# Altium PCB Screen.PcbDoc
Units mil, origin at the board's own origin, x right, y up, seen from the top; angles counter-clockwise.
Board outline 1377.95 x 1377.95 mil, 2 copper layers (Top Layer, Bottom Layer), stack 46.501 mil thick; 11 components, 11 nets, 36 pads, 15 vias.
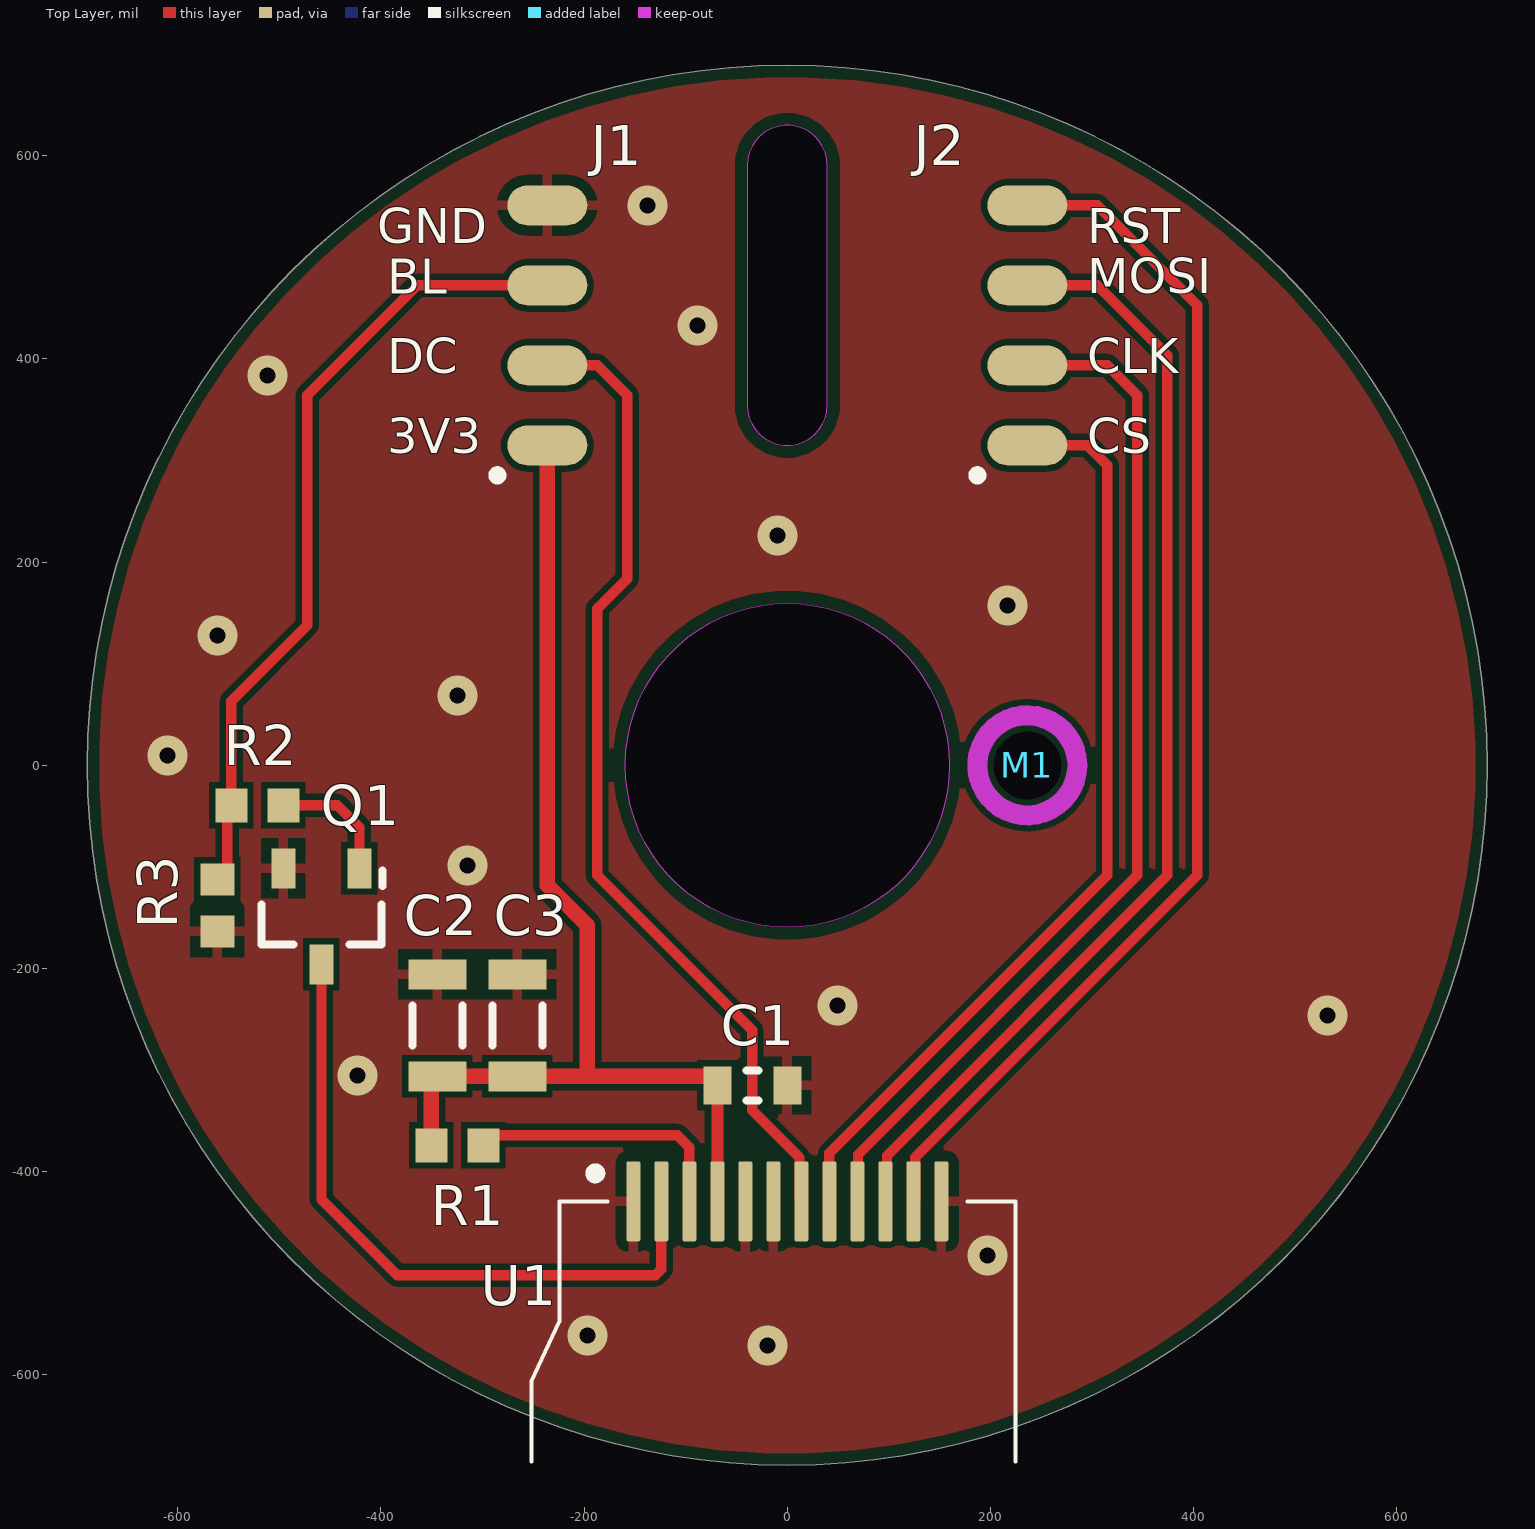
[diagram p0: Top Layer view]
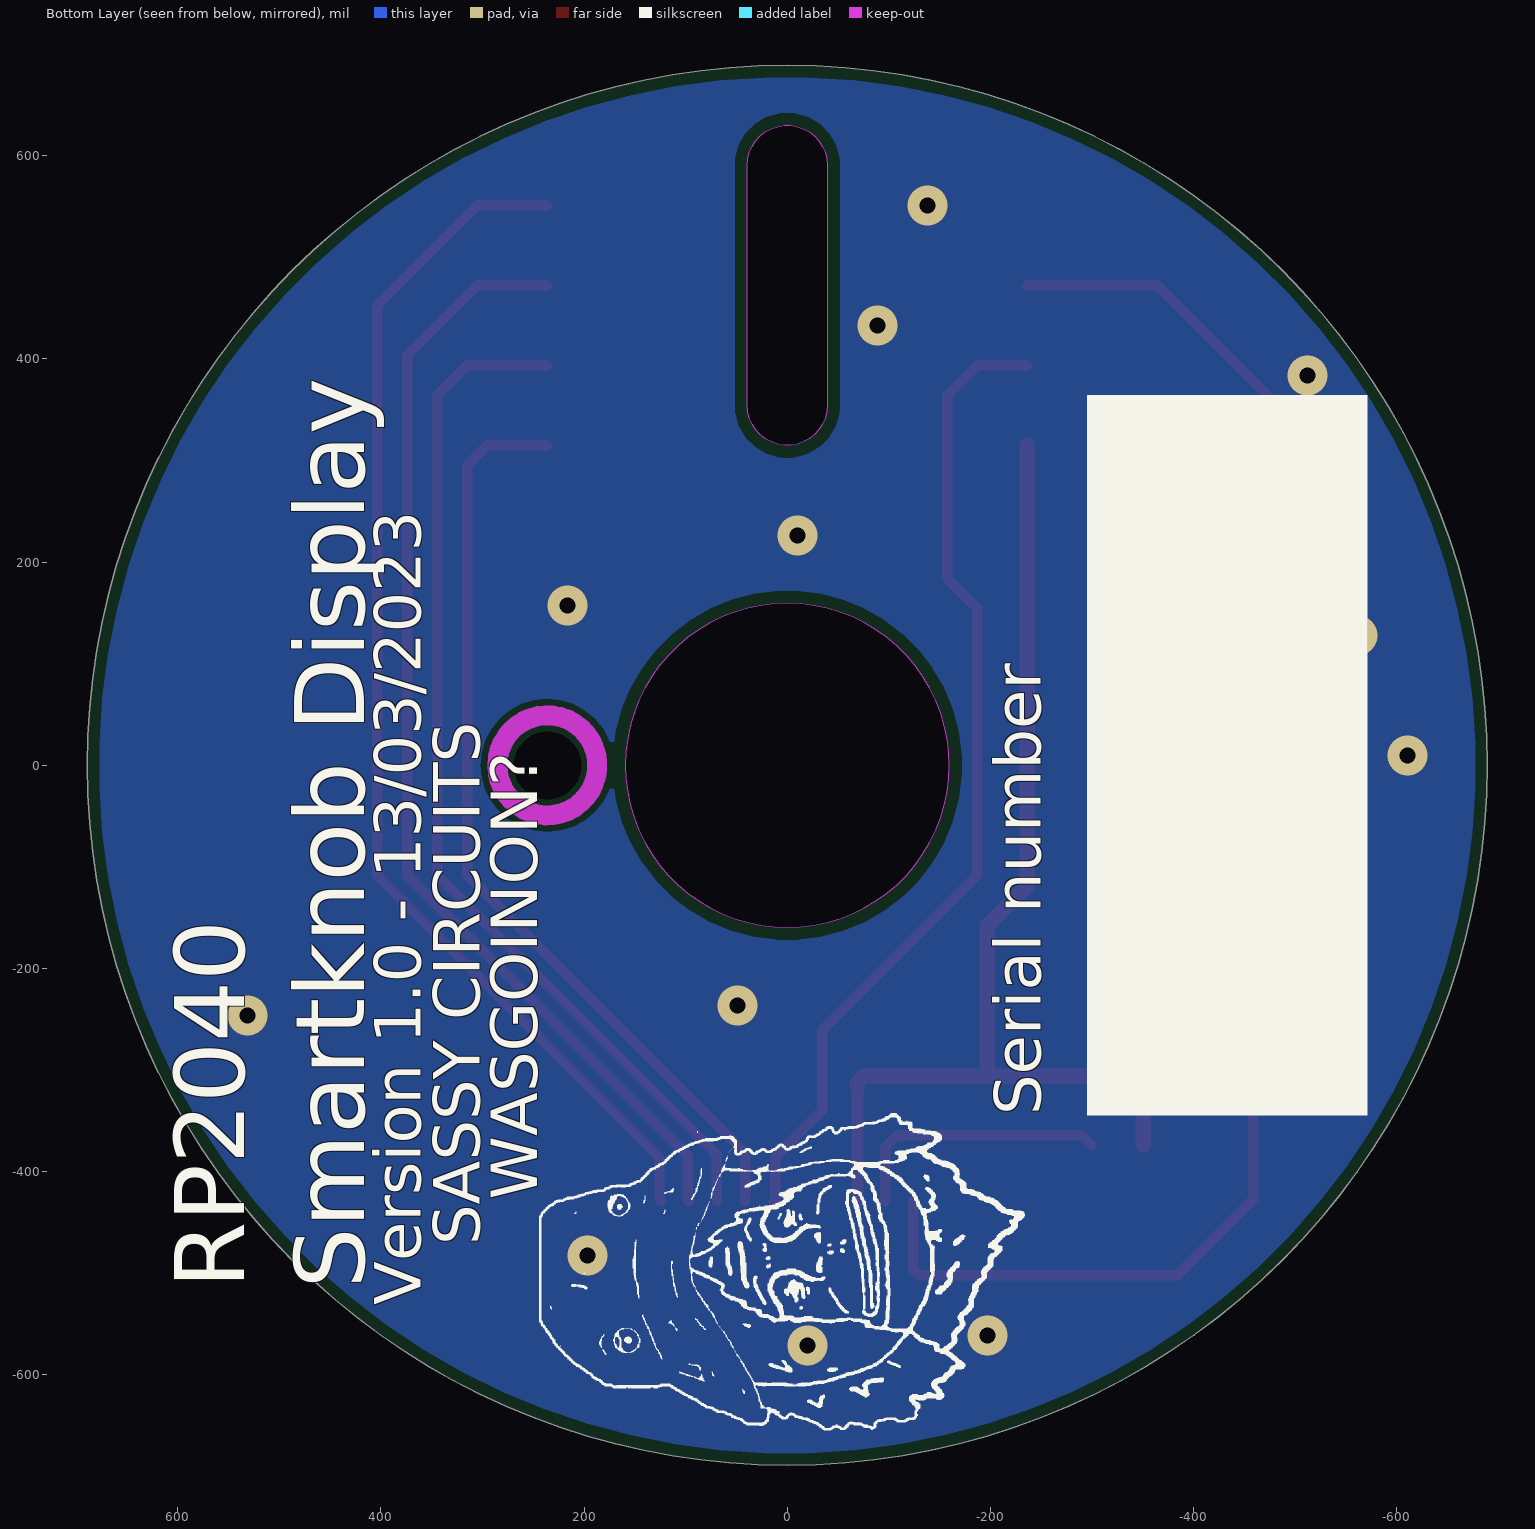
[diagram p1: Bottom Layer view, seen from below]
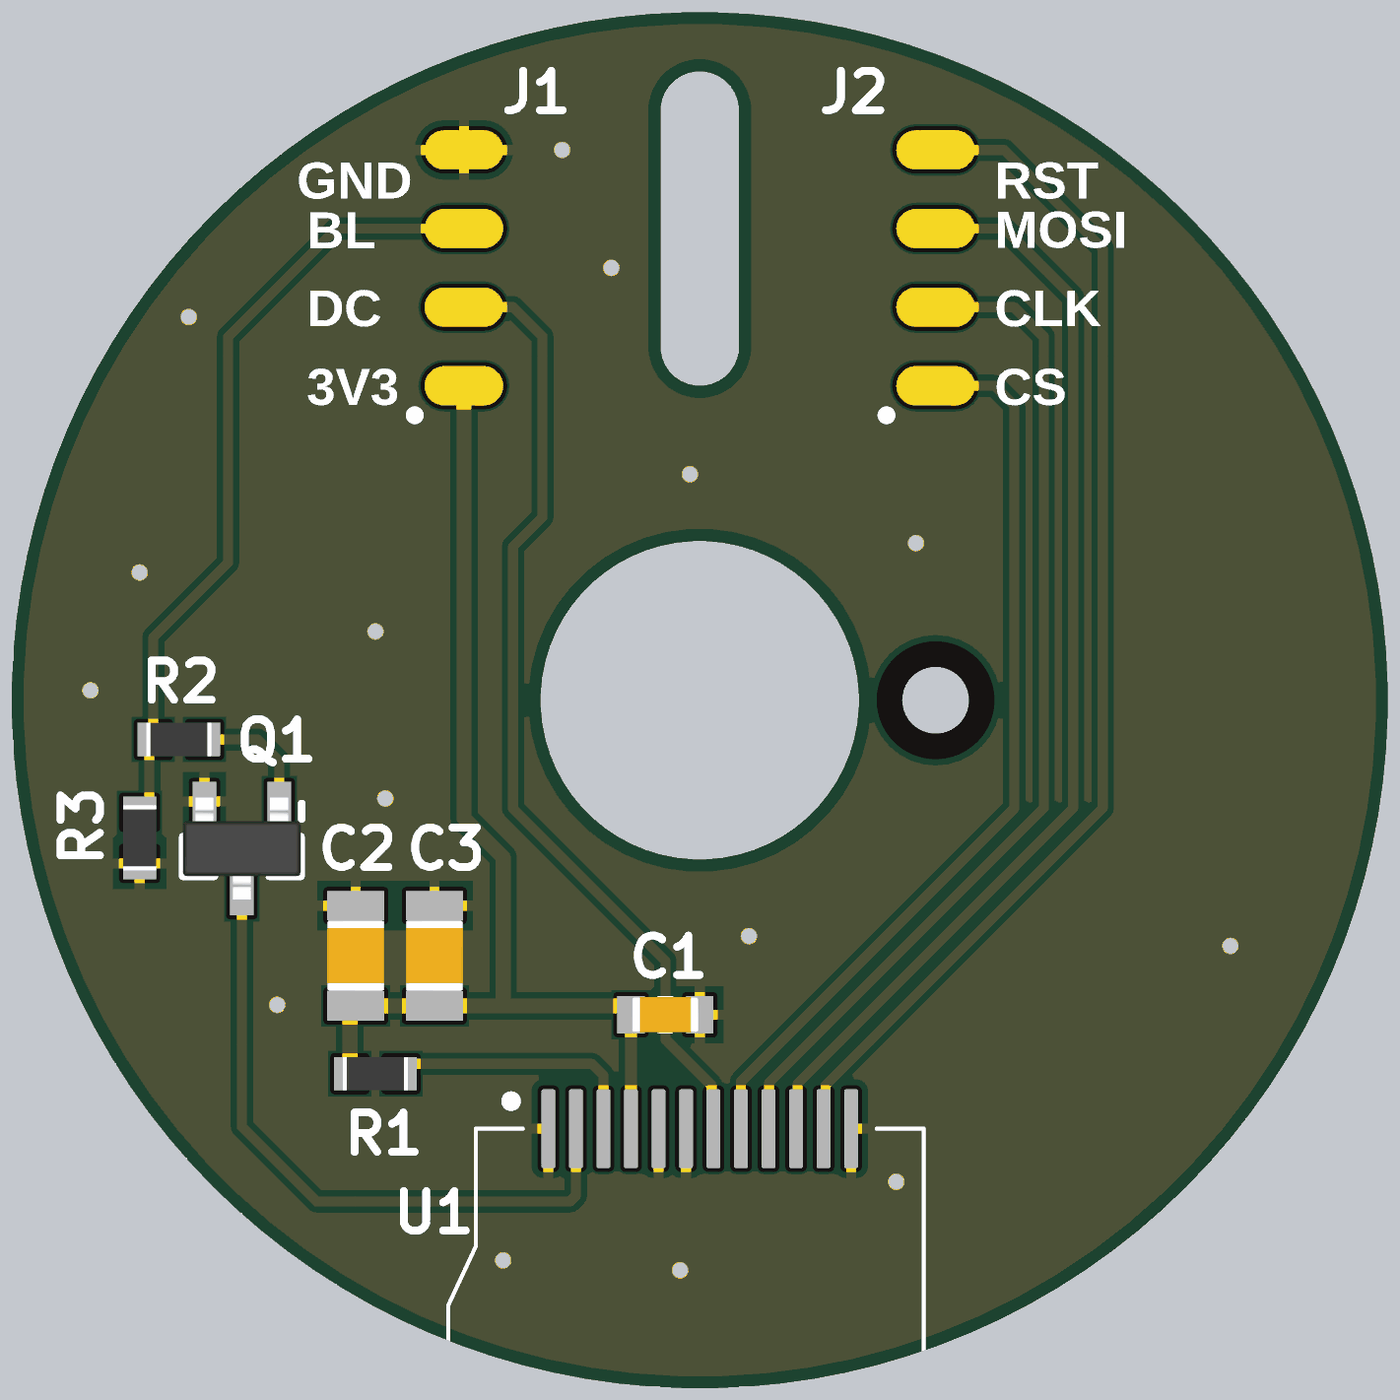
[diagram p2: 3D render of the assembled board from above, using the file's embedded part models]

## Layer stack, top to bottom
Top Solder: solder mask 0.4, Solder Resist, Dk 3.5
Top Layer: signal copper 1.4
Dielectric 1: dielectric 43.7008, FR-4, Dk 4.8
Bottom Layer: signal copper 1.4
Bottom Solder: solder mask 0.4, Solder Resist, Dk 3.5

## Board outline
0,-688.98 cw(c0,0) -688.98,0 cw(c0,0) 0,688.98 cw(c0,0) 688.98,0 cw(c0,0)
cut-out: -39.37,354.33 ccw(c0,354.33) 39.37,354.33 39.37,590.55 ccw(c0,590.55) -39.37,590.55
cut-out: 0,-159.45 cw(c0,0) -159.45,0 cw(c0,0) 0,159.45 cw(c0,0) 159.45,0 cw(c0,0)

## Design rules (kind name [scope] priority, off if disabled: settings)
BoardOutlineClearance [All] p1: gap=11.81 ignorepadtopadclearanceinfootprint=FALSE except(0: Arc-SplitContinuation Track-SplitContinuation SMDPad-SplitContinuation THPad-SplitContinuation Via-SplitContinuation Fill-SplitContinuation Poly-SplitContinuation Region-SplitContinuation Text-SplitContinuation; 10: Arc-OutlineEdge Arc-CavityEdge Arc-CutoutEdge Arc-SplitBarrior Text-OutlineEdge Text-CavityEdge Text-CutoutEdge Text-SplitBarrior)
Clearance [All] p1: gap=6 ignorepadtopadclearanceinfootprint=FALSE except(0: Arc-Hole Track-Hole SMDPad-Hole THPad-Hole Via-Hole Fill-Hole Poly-Hole Region-Hole Text-Hole)
ComponentClearance [All] p1: gap=3.94 collisioncheckmode=3 verticalgap=10 showdistances=FALSE
HoleSize [All] p1: absolutevalues=TRUE maxlimit=236.22 minlimit=11.81 maxpercent=80.000 minpercent=20.000
MinimumAnnularRing [All] p1: minimumring=5.91
MinimumSolderMaskSliver [All] p1: minsoldermaskwidth=3.94
PolygonConnect [All] p1: thpad.connectstyle=Relief thpad.reliefconductorwidth=10 thpad.reliefentries=4 thpad.polygonreliefangle="90 Angle" thpad.airgapwidth=10 smdpad.connectstyle=Relief smdpad.reliefconductorwidth=10 smdpad.reliefentries=4 smdpad.polygonreliefangle="90 Angle" smdpad.airgapwidth=10 via.connectstyle=Direct via.reliefconductorwidth=10 via.reliefentries=4 via.polygonreliefangle="90 Angle" via.airgapwidth=10
RoutingVias [All] p1: holewidth=15.75 width=39.37 viastyle="Through Hole" minholewidth=11.81 minwidth=27.56 maxholewidth=39.37 maxwidth=157.48
SilkToSolderMaskClearance [IsPad] p1: minsilkscreentomaskgap=5.91 clearancetoexposedcopper=TRUE
SolderMaskExpansion [All] p1: expansion=4 istentingtop=FALSE
Width [All] p1: maxlimit=100 minlimit=6 preferedwidth=10 minimp=50.000000 maximp=50.000000 favimp=50.000000
26 further rules are at their usual default settings.

## Components (designator, comment, footprint, x,y, rotation, side; value= is the part's Value field where it differs from the comment)
C1 "CAP" C0603 -34.45,-314.96 r0 top value=100nF
C2 "CAP" C0805 -344.49,-255.91 r90 top value=10uF
C3 "CAP" C0805 -265.75,-255.91 r90 top value=10uF
J1 "Conn-4pos" 2mm_pads_4 -236.22,433.07 r90 top
J2 "Conn-4pos" 2mm_pads_4 236.22,433.07 r90 top
M1 "Mounting_Hole_Unplated" M1.6_Close_Unplated 236.22,0 r0 top locked
Q1 "NMOS_SOT23" SOT23 -458.65,-148.63 r270 top value=NMOS
R1 "RES" R0603 -324.8,-374.02 r180 top value=22R
R2 "RES" R0603 -521.65,-39.37 r0 top value=10K
R3 "RES" R0603 -561.02,-137.8 r90 top value=1M
U1 "GC9A01" GC9A01 0,-429.13 r90 top locked value=Display

## Footprints (in the part's own frame and the unit in brackets; to place one, negate y for a bottom-side part, rotate by r counter-clockwise, add the part's x,y. Pads: shape width x height; smd on the part's side, far side on the other; paste and mask are expansions set on the pad)
2mm_pads_4 [mm]
  oval 1x2 smd paste-2539.97: 1(-3,0) 2(-1,0) 3(1,0) 4(3,0)
  silkscreen extent -3.85,1.15 -3.65,1.35
C0603 [mm]
  rect 0.7x0.95 smd: 1(-0.875,0) 2(0.875,0)
  silkscreen extent -0.15,-0.38 0.15,0.38, body extent -0.85,-0.45 0.85,0.45, height 0.9
C0805 [mm]
  rect 0.75x1.45 smd: 1(-1.275,0) 2(1.275,0)
  silkscreen extent -0.5,-0.63 0.5,0.63, body extent -0.9,-0.72 0.9,0.72, height 1.45
GC9A01 [mm]
  rrect25% 2x0.35 smd: 1(0,3.85) 2(0,3.15) 3(0,2.45) 4(0,1.75) 5(0,1.05) 6(0,0.35) 7(0,-0.35) 8(0,-1.05) 9(0,-1.75) 10(0,-2.45) 11(0,-3.15) 12(0,-3.85)
  silkscreen extent -6.5,-5.7 0.82,6.4
M1.6_Close_Unplated [mm]
  round 0 hole 1.7 unplated mask+1.5: 1(0,0)
  Keep-Out Layer circle w0.5: c0,0 r1.25
R0603 [mm]
  rect 0.8x0.85 smd: 1(-0.65,0) 2(0.65,0)
  body extent -0.82,-0.43 0.82,0.43, height 0.5
SOT23 [mm]
  rect 1x0.6 smd: 1(-1.2,0.95) 2(-1.2,-0.95) 3(1.2,0)
  silkscreen extent -1.14,-1.5 0.7,1.52, body extent -1.3,-1.5 1.3,1.5, height 1.1

## Part data
C1: library part CGA3E2X7R1H104K080AA, "General purpose ceramic capacitor", Manufacturer="TDK Corporation", Package Ref=C0603, Supplier Part No=445-5666-1-ND, Voltage=50V, Fitted=Fitted, Generic=Generic, Manufacturer Part No=CGA3E2X7R1H104K080AA, Part Reference=CGA3E2X7R1H104K080AA, Ready for use=y, Specification="X7R, 50V, AEC-Q200 Qualified", Supplier=Digi-Key
C2 C3: library part CGA4J1X7S1C106K125AC, "General purpose ceramic capacitor", Manufacturer="TDK Corporation", Package Ref=C0805, Supplier Part No=445-16110-1-ND, Voltage=16V, Fitted=Fitted, Generic=Generic, Manufacturer Part No=CGA4J1X7S1C106K125AC, Part Reference=CGA4J1X7S1C106K125AC, Ready for use=y, Specification="X7S, 16V, AEC-Q200 Qualified", Supplier=Digi-Key
J1 J2: library part 2mm_pads_4, "2mm pitch solder pads", Fitted=Fitted, Generic=Generic, Manufacturer Part No=2mm_pads_4, Package Ref=2mm_pads_4, Part Reference=2mm_pads_4, Ready for use=y
M1: library part M1.6_Close_Unplated, "M1.6 Hole, Unplated", Fitted=Fitted, Generic=Generic, Package Ref=M1.6_Close_Unplated, Part Reference=M1.6_Close_Unplated, Ready for use=y, Specification="Close clearance"
Q1: library part BSS138, "General purpose N-Channel MOSFET in SOT23 packagge", Manufacturer=onsemi, Package Ref=SOT23, Supplier Part No=BSS138CT-ND, Fitted=Fitted, Generic=Generic, Manufacturer Part No=BSS138, Part Reference=BSS138, Ready for use=y, Specification="Vds 50V, Id 220mA", Supplier=Digi-Key
R1: library part CRCW060322R0JNEA, "General purpose automotive thick film resistor", Manufacturer="Vishay Dale", Package Ref=R0603, Supplier Part No=541-22GCT-ND, Fitted=Fitted, Generic=Generic, Manufacturer Part No=CRCW060322R0JNEA, Part Reference=CRCW060322R0JNEA, Ready for use=y, Specification="5%, 200ppm, 0.1W, AEC-Q200 Qualified", Supplier=Digi-Key
R2: library part CRCW060310K0JNEA, "General purpose automotive thick film resistor", Manufacturer="Vishay Dale", Package Ref=R0603, Supplier Part No=541-10KGCT-ND, Fitted=Fitted, Generic=Generic, Manufacturer Part No=CRCW060310K0JNEA, Part Reference=CRCW060310K0JNEA, Ready for use=y, Specification="5%, 200ppm, 0.1W, AEC-Q200 Qualified", Supplier=Digi-Key
R3: library part CRCW06031M00JNEA, "General purpose automotive thick film resistor", Manufacturer="Vishay Dale", Package Ref=R0603, Supplier Part No=541-1.0MGCT-ND, Fitted=Fitted, Generic=Generic, Manufacturer Part No=CRCW06031M00JNEA, Part Reference=CRCW06031M00JNEA, Ready for use=y, Specification="5%, 200ppm, 0.1W, AEC-Q200 Qualified", Supplier=Digi-Key
U1: "240x240 px round IPS display", Manufacturer=N/A, Fitted=Fitted, Generic="Non Generic", Manufacturer Part No=GC9A01, Package Ref=GC9A01, Part Reference=GC9A01, Ready for use=n, Supplier=N/A, Supplier Part No=N/A

## Via types
v1: diameter 39.37, hole 15.75, Top Layer to Bottom Layer, tented both sides, 15 vias

## Nets (pads, with @x,y where several pads share a name; then routed paths per layer and width w, separated by ;. In a path a pad name is that pad's centre, name@x,y a point inside that pad or via, vN(x,y) a via of type N, cw(c..) or ccw(c..) an arc to the next point about the centre after c; other vN are vias at no path point)
+3V3: C1.1 C2.1 C3.1 J1.1 R1.2 U1.4 | length 1102.7
  Top Layer w11.81: U1.4 C1.1
  Top Layer w15: R1.2 -350.39,-312.01 C2.1 C3.1 -196.85,-306.1 ; J1.1 -236.22,-118.11 -196.85,-157.48 -196.85,-306.1 ; C1.1 -68.9,-312.38 -75.18,-306.1 -196.85,-306.1
CLK: J2.2 U1.9 | length 1028
  Top Layer w10: U1.9 69.49,-428.54 69.49,-383.26 344.49,-108.27 344.49,364.17 314.96,393.7 J2.2
CSn: J2.1 U1.8 | length 924.6
  Top Layer w10: U1.8 41.34,-381.89 314.96,-108.27 314.96,295.28 295.28,314.96 J2.1
DC: J1.2 U1.7 | length 979.7
  Top Layer w10: J1.2 -187.01,393.7 -157.48,364.17 -157.48,183.61 -187.01,154.09 -187.01,-108.27 -34.45,-260.83 -34.45,-339.57 11.89,-385.91 11.89,-427.24 U1.7
GND: C1.2 C2.2 C3.2 J1.4 Q1.2 R3.1 U1.1 U1.5 U1.6 U1.12
  other v1: -19.68,-570.87 -196.85,-561.02 196.85,-482.28 -423.23,-305.12 531.5,-246.06 49.21,-236.22 -314.96,-98.43 -610.24,9.84 -324.8,68.9 -561.02,127.95 216.54,157.48 -9.84,226.38 -511.81,383.86 -88.58,433.07 -137.8,551.18
MOSI: J2.3 U1.10 | length 1114
  Top Layer w10: U1.10 98.04,-427.56 98.04,-384.25 374.02,-108.27 374.02,403.54 305.12,472.44 J2.3
NetJ1_3: J1.3 R2.1 R3.2 | length 794.1
  Top Layer w10: R3.2 -551.18,-102.36 -551.18,-43.31 R2.1 -547.24,62.99 -472.44,137.8 -472.44,364.17 -364.17,472.44 J1.3
NetQ1_1: Q1.1 R2.2 | length 124.1
  Top Layer w10: R2.2 -442.91,-39.37 -421.25,-61.03 Q1.1
NetQ1_3: Q1.3 U1.2 | length 666.3
  Top Layer w10: Q1.3 -458.65,-427.18 -383.86,-501.97 -129.87,-501.97 -124.02,-496.11 U1.2
NetR1_1: R1.1 U1.3 | length 264.9
  Top Layer w10: R1.1 -289.37,-364.17 -108.27,-364.17 -96.46,-375.98 U1.3
RESETn: J2.4 U1.11 | length 1205.8
  Top Layer w10: U1.11 125.91,-427.24 125.91,-385.91 403.54,-108.27 403.54,452.76 305.12,551.18 J2.4
pads on no net: M1.1

## Polygon pours and split planes (outlines as drawn)
GND on Bottom Layer "GND_L02_P000" (solid, pour order 0): -708.66,708.66 708.66,708.66 708.66,-708.66 -708.66,-708.66
GND on Top Layer "GND_L01_P001" (solid, pour order 1): -707.86,711.64 709.46,711.64 709.46,-705.68 -707.86,-705.68
no net on Bottom Overlay "NONET_L-01_P-001" (solid): -295.28,364.17 -570.87,364.17 -570.87,-344.49 -295.28,-344.49

## Silkscreen, mask and mechanical layers (free items; w line width, h text height)
Top Overlay:
  text "GND" at -403.54,502.62 h59.06
  text "RST" at 295.28,502.62 h59.06
  text "BL" at -393.7,452.76 h59.06
  text "MOSI" at 295.28,453.41 h59.06
  text "DC" at -393.7,374.67 h59.06
  text "CLK" at 295.28,374.67 h59.06
  text "3V3" at -393.7,295.93 h59.06
  text "CS" at 295.28,295.93 h59.06
Bottom Overlay:
  drawing of 107 lines, arcs and shapes, not listed
  text "Serial number" at -264.87,-344.49 h78.74 r270
  text "WASGOINON?" at 230.86,-427.39 h78.74 r270
  text "SASSY CIRCUITS" at 287.66,-472.44 h78.74 r270
  text "RP2040 / Smartknob Display" at 393.7,-514.96 h118.11 r270
  text "Version 1.0 - 13/03/2023" at 345.36,-531.5 h78.74 r270
Mechanical 1:
  text "Q1" at -457.68,-142.72 h25.59
  text "C2" at -220.47,-165.35 h25.59
  text "C3" at -44.29,-260.83 h25.59
Board Shape:
  circle w3.94: c0,0 r688.98
  circle w3.94: c0,0 r159.45
  lines w3.94: -39.37,354.33 ccw(c0,354.33) 39.37,354.33 39.37,590.55 ccw(c0,590.55) -39.37,590.55 -39.37,354.33
Mechanical 4:
  circle w3.94: c0,0 r275.59